# Altium PCB MOSFET_Switch_Parallel.PcbDoc
Units mil, origin at the board's own origin, x right, y up, seen from the top; angles counter-clockwise.
Board outline 825 x 650 mil, 2 copper layers (Top Layer, Bottom Layer); 10 components, 130 nets, 26 pads, 0 vias.
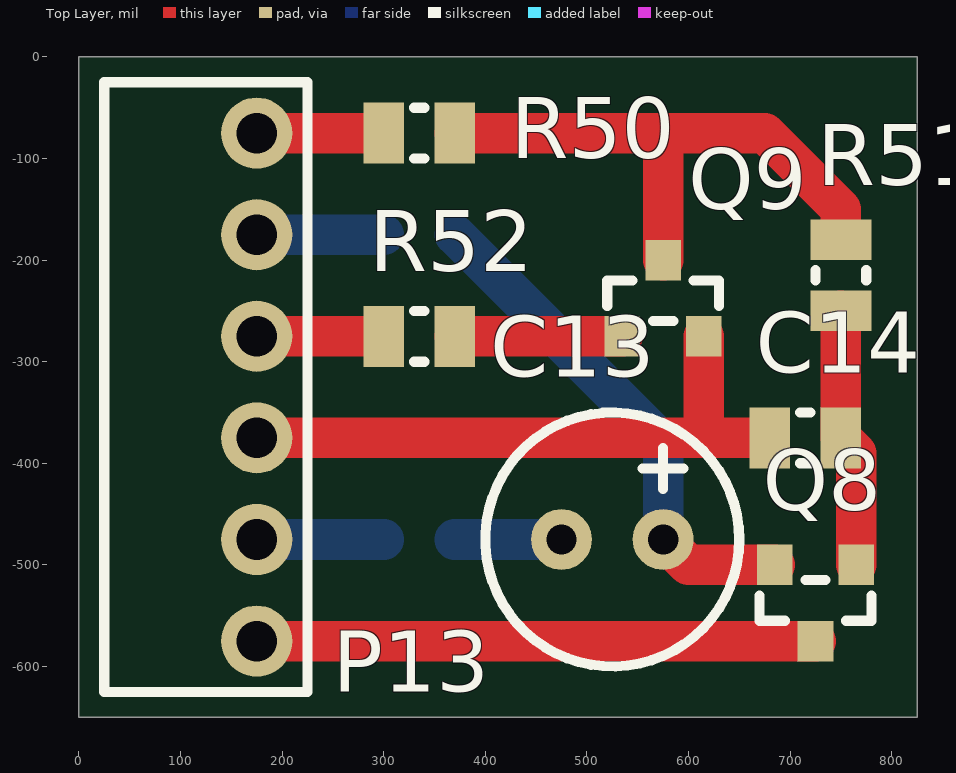
[diagram p0: Top Layer view]
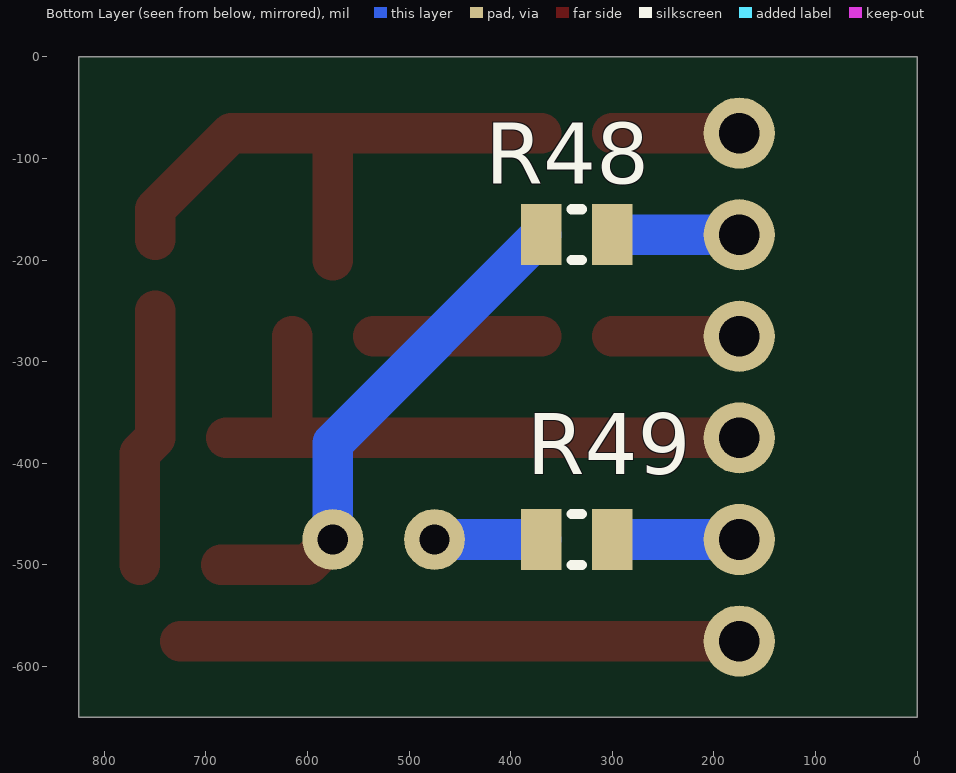
[diagram p1: Bottom Layer view, seen from below]
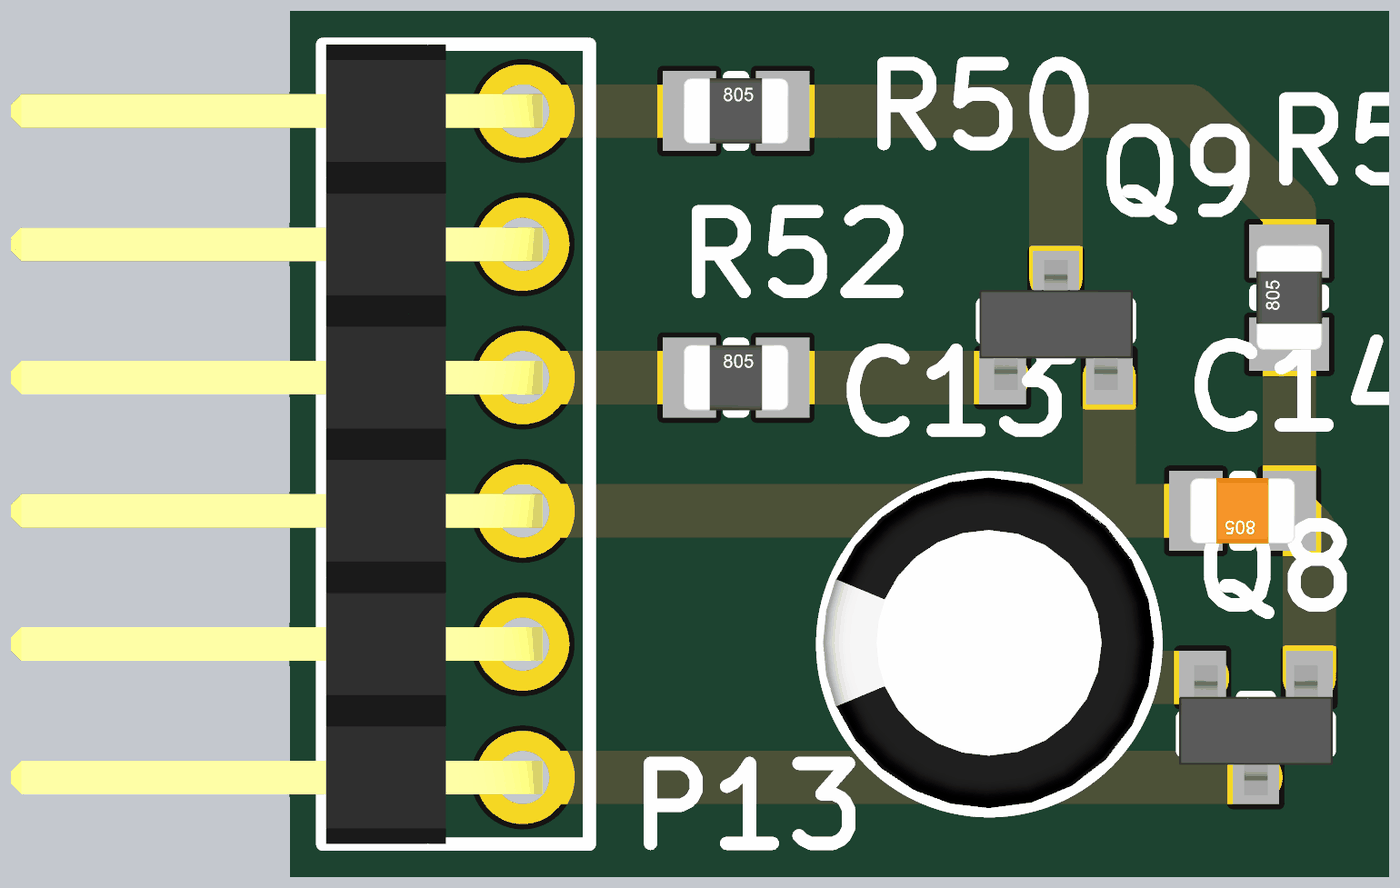
[diagram p2: 3D render of the assembled board from above, using the file's embedded part models]

## Layer stack, top to bottom
Top Solder: solder mask 0.4, Solder Resist, Dk 3.5
Top Layer: signal copper 1.4
Dielectric 1: dielectric 12.6, FR-4, Dk 4.8
Bottom Layer: signal copper 1.4
Bottom Solder: solder mask 0.4, Solder Resist, Dk 3.5

## Board outline
0,-650 0,0 825,0 825,-650

## Design rules (kind name [scope] priority, off if disabled: settings)
Clearance [All] p1: gap=10
PolygonConnect [All] p1: connectstyle=Relief reliefconductorwidth=10 reliefentries=4 polygonreliefangle="90 Angle" airgapwidth=10
RoomDefinition MOSFET_Switch_Parallel [InComponentClass('MOSFET_Switch_Parallel')] p1 off: confinementstyle=ConfineIn formatcopy=TRUE lockcomponents=FALSE outline 25,-625 800,-625 800,-25 25,-25
RoutingVias [All] p1: holewidth=28 width=50 viastyle="Through Hole" minholewidth=28 minwidth=50 maxholewidth=28 maxwidth=50
SilkToBoardRegionClearance [All] p1 off:
SolderMaskExpansion [All] p1: expansion=4
Width [All] p1: maxlimit=80 minlimit=40 preferedwidth=40
28 further rules are at their usual default settings.

## Components (designator, comment, footprint, x,y, rotation, side; value= is the part's Value field where it differs from the comment)
C13 "Electrolytic Capacitor" ELEC_RAD10 575,-475 r180 top
C14 "Capacitor" 0805_Capacitor 675,-375 r90 top
P13 "SIL-CONN-6" SIL-CONN-6-R2 175,-575 r180 top
Q8 "2N7002" SOT23-3 725,-575 r180 top
Q9 "2N7002" SOT23-3 575,-200 r0 top
R48 "Resistor" 0805_Resistor 375,-175 r90 bottom
R49 "Resistor" 0805_Resistor 375,-475 r90 bottom
R50 "Resistor" 0805_Resistor 375,-75 r270 top
R51 "Resistor" 0805_Resistor 750,-175 r0 top
R52 "Resistor" 0805_Resistor 375,-275 r270 top

## Footprints (in the part's own frame and the unit in brackets; to place one, negate y for a bottom-side part, rotate by r counter-clockwise, add the part's x,y. Pads: shape width x height; smd on the part's side, far side on the other; paste and mask are expansions set on the pad)
0805_Capacitor [mil]
  rect 60x40 smd: 1(0,-5) 2(0,-75)
  silkscreen extent -25,-45 25,-35, body extent -25,-79 25,-1, height 31
0805_Resistor [mil]
  rect 60x40 smd: 1(0,-5) 2(0,-75)
  silkscreen extent -25,-45 25,-35, body extent -25,-79 25,-1, height 31
ELEC_RAD10 [mil]
  round 60 hole 30: +(0,0) -(100,0)
  silkscreen extent -75,-125 175,125, body extent -74,-125 174,123, height 433
SIL-CONN-6-R2 [mil]
  round 70 hole 40: 1(0,0) 2(0,-100) 3(0,-200) 4(0,-300) 5(0,-400) 6(0,-500)
  silkscreen extent -50,-550 150,50, body extent -15,-550 384,50, height 99
SOT23-3 [mil]
  rect 35x40 smd: 1(0,0) 2(-40,-75) 3(40,-75)
  silkscreen extent -55,-60 55,-20, body extent -57,-84 57,13, height 39

## Nets (pads, with @x,y where several pads share a name; then routed paths per layer and width w, separated by ;. In a path a pad name is that pad's centre, name@x,y a point inside that pad or via, vN(x,y) a via of type N, cw(c..) or ccw(c..) an arc to the next point about the centre after c; other vN are vias at no path point)
1: 
2: 
3: 
4: 
5: 
6: 
7: 
8: 
9: 
10: 
11: 
12: 
A: 
B: 
C: 
CTRL: 
D: 
DP: 
DS: 
E: 
ENC1: 
ENC2: 
F: 
G: 
I2C_SCK: 
I2C_SDA: 
IN: 
KBD: 
M\R\1: 
M\R\2: 
MODE: 
MOSI: 
NetC3_+: 
NetC3_-: 
NetC4_+: 
NetC4_-: 
NetC5_-: 
NetC6_+: 
NetC6_-: 
NetC7_-: 
NetC8_+: 
NetC9_-: 
NetC10_2: 
NetC12_2: 
NetC13_+: C13.+ Q8.3 R48.1 | length 505.3
  Top Layer w40: C13.+ 600,-500 Q8.3
  Bottom Layer w40: R48.1 575,-380 C13.+
NetC13_-: C13.- R49.1 | length 105
  Bottom Layer w40: R49.1 C13.-
NetC14_2: C14.2 Q8.2 R51.2 | length 256.2
  Top Layer w40: R51.2 C14.2 765,-390 Q8.2
NetD1_A: 
NetD1_K: 
NetD2_A: 
NetD2_K: 
NetD3_A: 
NetD3_K: 
NetD4_A: 
NetD4_K: 
NetD5_A: 
NetD5_K: 
NetD6_A: 
NetD6_K: 
NetD7_A: 
NetD7_K: 
NetD8_A: 
NetD8_K: 
NetD9_A: 
NetD9_K: 
NetD10_A: 
NetD10_K: 
NetD11_A: 
NetD11_K: 
NetD12_A: 
NetD12_K: 
NetP1_1: 
NetP1_2: 
NetP1_3: 
NetP1_4: 
NetP1_5: 
NetP1_6: 
NetP9_1: 
NetP9_2: 
NetP9_3: 
NetP9_4: 
NetP9_5: 
NetP9_6: 
NetP10_1: 
NetP10_2: 
NetP10_3: 
NetP10_4: 
NetP10_5: 
NetP10_6: 
NetP13_1: P13.1 Q8.1 | length 550
  Top Layer w40: P13.1 Q8.1
NetP13_2: P13.2 R49.2 | length 125
  Bottom Layer w40: P13.2 R49.2
NetP13_4: P13.4 R52.2 | length 125
  Top Layer w40: P13.4 R52.2
NetQ6_D: 
NetQ6_G: 
NetQ7_D: 
NetQ7_G: 
NetQ9_D: Q9.1 R50.1 R51.1 | length 566.1
  Top Layer w40: R50.1 575,-75 ; Q9.1 575,-75 ; R51.1 750,-150 675,-75 575,-75
NetQ9_G: Q9.2 R52.1 | length 165
  Top Layer w40: R52.1 Q9.2
NetR13_2: 
NetR14_2: 
NetR15_2: 
NetR16_2: 
NetR17_2: 
NetR18_2: 
NetR19_2: 
NetR20_2: 
NetR21_2: 
NetR22_2: 
NetR24_2: 
NetR25_2: 
NetR26_1: 
NetR26_2: 
NetU3_9: 
NetU5_4: 
NetU5_9: 
NetU6_9: 
O\E\: C14.1 P13.3 Q9.3 | length 605
  Top Layer w40: P13.3 615,-375 ; Q9.3 615,-375 ; C14.1 615,-375
OUT: 
PULL-UP: 
R\E\S\E\T\: 
RETURN: 
RST: 
SCK: 
SEND: 
ST: 
UART_RX: 
VCC: P13.6 R50.2 | length 125
  Top Layer w40: P13.6 R50.2
VCC/2: P13.5 R48.2 | length 125
  Bottom Layer w40: P13.5 R48.2
X1: 
X2: 

## Silkscreen, mask and mechanical layers (free items; w line width, h text height)
Mechanical 1:
  the board outline again, w10